# Altium PCB shaolollc-usb_breakout_microusb.PcbDoc
Units mm, origin at the board's own origin, x right, y up, seen from the top; angles counter-clockwise.
Board outline 25.4 x 8.8 mm, 2 copper layers (Top Layer, Bottom Layer), stack 1.595 mm thick; 6 components, 5 nets, 18 pads, 0 vias.
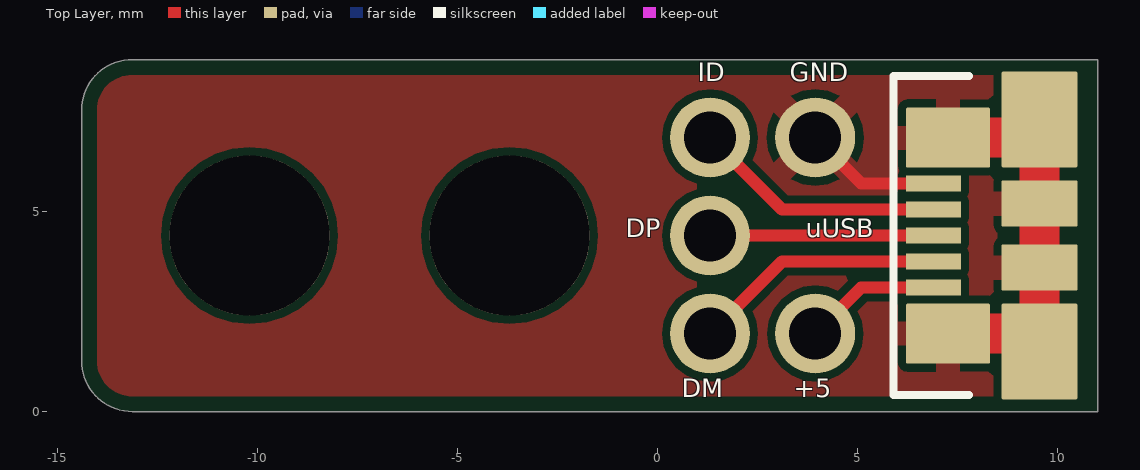
[diagram p0: Top Layer view]
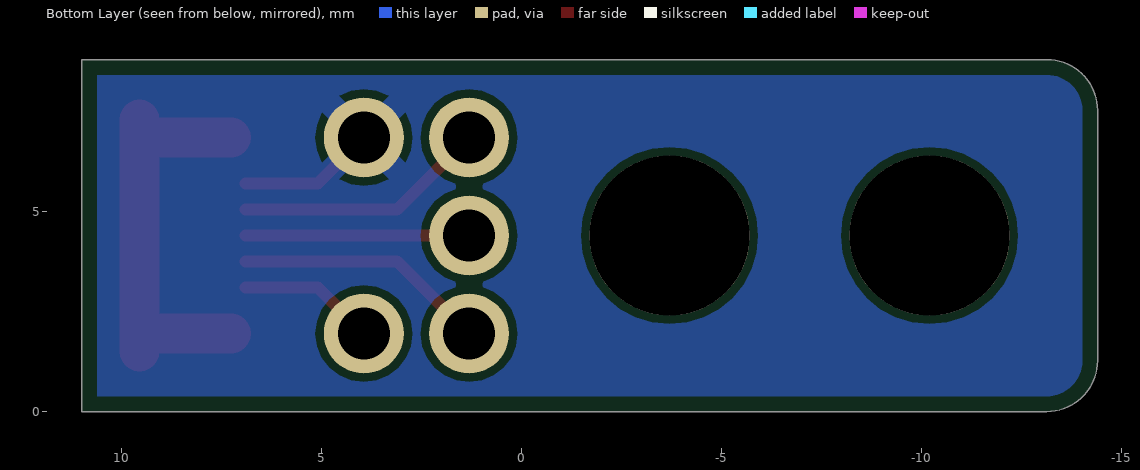
[diagram p1: Bottom Layer view, seen from below]

## Layer stack, top to bottom
Top Solder: solder mask 0.0254, Solder Resist, Dk 3.5
Top Layer: signal copper 0.0356
Dielectric 1: core 1.524, Dk 4.2
Bottom Layer: signal copper 0.0356
Bottom Solder: solder mask 0.0254, Solder Resist, Dk 3.5

## Board outline
-14.4,1.27 -14.4,7.53 cw(c-13.13,7.53) -13.13,8.8 11,8.8 11,0 -13.13,0 cw(c-13.13,1.27)

## Design rules (kind name [scope] priority, off if disabled: settings)
BoardOutlineClearance [All] p1: gap=0.381 ignorepadtopadclearanceinfootprint=FALSE
Clearance [All] p1: gap=0.2 ignorepadtopadclearanceinfootprint=FALSE
Height [All] p1: minheight=0 maxheight=33 prefheight=12.7
HoleSize [All] p1: absolutevalues=TRUE maxlimit=3.556 minlimit=0.254 maxpercent=80.000 minpercent=20.000
MinimumAnnularRing [All] p1: minimumring=0.127
MinimumSolderMaskSliver [All] p1: minsoldermaskwidth=0.102
PlaneClearance [All] p1: clearance=0.254
PlaneConnect [All] p1: pad.planeconnectstyle=Relief pad.reliefexpansion=0.508 pad.reliefentries=4 pad.reliefconductorwidth=0.508 pad.reliefairgap=0.254 via.planeconnectstyle=Direct via.reliefexpansion=0.508 via.reliefentries=4 via.reliefconductorwidth=0.508 via.reliefairgap=0.254
PolygonConnect [All] p1: thpad.connectstyle=Relief thpad.reliefconductorwidth=0.6 thpad.reliefentries=4 thpad.polygonreliefangle="45 Angle" thpad.airgapwidth=0.2 smdpad.connectstyle=Relief smdpad.reliefconductorwidth=0.6 smdpad.reliefentries=4 smdpad.polygonreliefangle="90 Angle" smdpad.airgapwidth=0.2 via.connectstyle=Direct via.reliefconductorwidth=0.254 via.reliefentries=4 via.polygonreliefangle="90 Angle" via.airgapwidth=0.254
RoutingCorners [All] p1: cornerstyle=45-Degree minsetback=0.508 maxsetback=2.54
RoutingVias RoutingVias_1 [InAnyComponent] p1: holewidth=0.25 width=0.25 viastyle="Through Hole" minholewidth=0.25 minwidth=0.25 maxholewidth=0.711 maxwidth=1.27
RoutingVias [All] p2: holewidth=0.254 width=0.508 viastyle="Through Hole" minholewidth=0.254 minwidth=0.508 maxholewidth=6.731 maxwidth=7.62
SilkToSilkClearance [All] p1: silktosilkclearance=0.127
SilkToSolderMaskClearance [IsPad] p1: minsilkscreentomaskgap=0 clearancetoexposedcopper=TRUE
SolderMaskExpansion [All] p1: expansion=0.076
UnRoutedNet [All] p1: checkbadconnections=TRUE
Width [All] p1: maxlimit=12.7 minlimit=0.152 preferedwidth=0.203
21 further rules are at their usual default settings.

## Classes and differential pairs
net class uUSB_Nets: Net+5_1 NetDM_1 NetDP_1 NetGND_1 NetID_1
net class ID_Nets: NetID_1
net class GND_Nets: NetGND_1
net class DP_Nets: NetDP_1
net class DM_Nets: NetDM_1
net class +5_Nets: Net+5_1

## Components (designator, comment, footprint, x,y, rotation, side; value= is the part's Value field where it differs from the comment)
+5 "=Comment" 1.3_2.0MM_PH 3.942,1.95 r0 top value=1.3_2.0MM_MH
DM "=Comment" 1.3_2.0MM_PH 1.312,1.95 r0 top value=1.3_2.0MM_MH
DP "=Comment" 1.3_2.0MM_PH 1.312,4.4 r0 top value=1.3_2.0MM_MH
GND "=Comment" 1.3_2.0MM_PH 3.942,6.85 r0 top value=1.3_2.0MM_MH
ID "=Comment" 1.3_2.0MM_PH 1.312,6.85 r0 top value=1.3_2.0MM_MH
uUSB "=Comment" "USB Micro B" 9.55,4.4 r270 top value=47346-0001

## Footprints (in the part's own frame and the unit in brackets; to place one, negate y for a bottom-side part, rotate by r counter-clockwise, add the part's x,y. Pads: shape width x height; smd on the part's side, far side on the other; paste and mask are expansions set on the pad)
1.3_2.0MM_PH [mm] "1.3mm Plated Hole with 2.0mm pad"
  round 2 hole 1.3 paste-2.54: 1(0,0)
"USB Micro B" [mm] "USB Micro B connector"
  rrect5% 2.4x1.9 smd mask+0.05: 0(-2.9,0) 0(2.9,0)
  rrect5% 1.5x2.1 smd mask+0.05: 0(-2.45,-2.29) 0(2.45,-2.29)
  rrect5% 1.15x1.9 smd mask+0.05: 0(-0.8,0) 0(0.8,0)
  rrect5% 0.4x1.38 smd mask+0.05: 1(1.3,-2.65) 2(0.65,-2.65) 3(0,-2.65) 4(-0.65,-2.65) 5(-1.3,-2.65)
  silkscreen extent -3.99,-3.65 3.99,-1.76, body extent -3.99,-2.85 3.99,2.58, height 2.71

## Part data
+5 DM DP GND ID: library part PCB_0092, "1.3_2.0MM_MH", Manufacturer="Misc PCB", Manufacturer Part Number=S46, ClassName="Plated Holes", ComponentLink1Description="Manufacturer URL", ComponentLink1URL=0, ComponentLink2Description="Datasheet URL", ComponentLink3Description="Package URL", Part Number=PCB_0092, Published=1/20/2015, Publisher=shawn@shaolo.com, Reviewer=shawn@shaolo.com, RoHS=True, Supplier 1=ShaoloLLC, UID=61
uUSB: library part CONN_0056, "CONN RCPT 5POS MICRO USB R/A", Manufacturer=Molex, Manufacturer Part Number=47346-0001, Supplier Part Number 1=WM17141CT-ND, ComponentLink1Description="Manufacturer URL", ComponentLink1URL=0, ComponentLink2Description="Datasheet URL", ComponentLink3Description="Package URL", Conductors=5, HelpURL=http://www.molex.com/pdm_docs/sd/473460001_sd.pdf, Orientation=RA, Part Number=CONN_0056, Published=2/16/2010, Publisher=shawn@shaolo.com, Reflow?=True, Reviewer=shawn@shaolo.com, RoHS=False, SMT?=False, Supplier 1=Digi-Key, UID=55

## Free pads (board coordinates)
  round 4 hole 4 unplated: 1(-10.2,4.4) 1(-3.7,4.4)

## Nets (pads, with @x,y where several pads share a name; then routed paths per layer and width w, separated by ;. In a path a pad name is that pad's centre, name@x,y a point inside that pad or via, vN(x,y) a via of type N, cw(c..) or ccw(c..) an arc to the next point about the centre after c; other vN are vias at no path point)
Net+5_1: +5.1 uUSB.1 | length 3.4
  Top Layer w0.3: +5.1 5.092,3.1 uUSB.1
NetDM_1: DM.1 uUSB.2 | length 6.3
  Top Layer w0.3: DM.1 3.112,3.75 uUSB.2
NetDP_1: DP.1 uUSB.3 | length 5.6
  Top Layer w0.3: DP.1 uUSB.3
NetGND_1: GND.1 uUSB.0 uUSB.5 | length 13.8
  Top Layer w0.3: GND.1 5.092,5.7 uUSB.5
  Top Layer w1: uUSB.0@7.26,1.95 uUSB.0@9.55,1.95 ; uUSB.0@7.26,6.85 uUSB.0@9.55,6.85 ; uUSB.0@9.55,1.5 uUSB.0@9.55,1.95 ; uUSB.0@9.55,7.3 uUSB.0@9.55,6.85 ; uUSB.0@9.55,1.95 9.55,3.6 9.55,5.2 uUSB.0@9.55,6.85
NetID_1: ID.1 uUSB.4 | length 6.3
  Top Layer w0.3: ID.1 3.112,5.05 uUSB.4

## Polygon pours and split planes (outlines as drawn)
NetGND_1 on Top Layer "Top Layer-NetGND_1" (solid, pour order 2): -16.8,11.3
NetGND_1 on Top Layer "NETGND_1_L01_P000" (solid, remove dead copper, pour order 0): -14.4,8.8 11,8.8 11,0 -14.4,0
NetGND_1 on Bottom Layer "NETGND_1_L02_P004" (solid, remove dead copper, pour order 4): -14.4,8.8 11,8.8 11,0 -14.4,0

## Silkscreen, mask and mechanical layers (free items; w line width, h text height)
Bottom Solder:
  drawing of 4 lines, arcs and shapes, not listed
M1-Outline:
  lines w0.254: -14.4,1.27 ccw(c-13.13,1.27) -13.13,0 11,0 11,8.8 -13.13,8.8 ccw(c-13.13,7.53) -14.4,7.53 -14.4,4.4 -14.4,1.27

## Dimensions
-13.13,8.8 to -13.13,0 on M2-Dims
11,8.8 to -14.4,7.53 on M2-Dims

## Text inside footprints (layer, text, board x,y; h text height)
uUSB: M15-TCtYd "Board Edge" at 11,6.35 h0.8 r270